# EAGLE board mainboard (EAGLE 7.5.0)

Size 93.65 x 52.06 mm. Coordinates in mm from the lower left corner, seen from the top.
Outline: 0,0 93.65,0 93.65,52.06 0,52.06 0,0
Copper layers (1*16): Top 0.035mm / dielectric 1.5mm / Bottom 0.035mm
Design rules "default": minimum track width 10mil, minimum drill 24mil, track to track 8mil, track to pad 8mil, pad to pad 8mil, via to via 8mil, smd to smd 8mil, copper to edge 40mil, drill to drill 8mil, minimum pad ring 10mil, minimum via ring 8mil, stop-mask expansion 4mil, vias tented up to drill 0mil, thermal gap 10mil

## Footprints (pad centres in the part's own frame; a part is rotated, then mirrored left to right if it is on the bottom)
153CLV-0405 = smd 2.6 x 1.6: + 1.8,0; - -1.8,0
C0603K = smd 1.05 x 1.08: 1 -0.875,0; 2 0.875,0
1X15SMD = smd 1.016 x 3.302: 1 -1.27,1.27; 2 1.27,-1.27; 3 3.81,1.27; 4 6.35,-1.27; 5 8.89,1.27; 6 11.43,-1.27; 7 13.97,1.27; 8 16.51,-1.27; 9 19.05,1.27; 10 21.59,-1.27; 11 24.13,1.27; 12 26.67,-1.27; 13 29.21,1.27; 14 31.75,-1.27; 15 34.29,1.27
1X07SMD = smd 1.016 x 3.302: 1 -1.27,1.27; 2 1.27,-1.27; 3 3.81,1.27; 4 6.35,-1.27; 5 8.89,1.27; 6 11.43,-1.27; 7 13.97,1.27
L4035M = smd 2.2 x 1.4: 1 -1.6,0; 2 1.6,0
WS2812B = smd 2 x 1.1: DIN 2,1.7; DOUT -2,-1.7; VDD -2,1.7; VSS 2,-1.7
R0603 = smd 1 x 1.1: 1 -0.85,0; 2 0.85,0
255SB = drill 1.118 long: 1 -3.81,0; 2 0,0; 3 3.81,0
XCVR_DWM1000 = smd 2.45 x 1: 1 -6.4,1.8; 2 -6.4,0.4; 3 -6.4,-1; 4 -6.4,-2.4; 5 -6.4,-3.8; 6 -6.4,-5.2; 7 -6.4,-6.6; 8 -6.4,-8; 17 6.4,-8; 18 6.4,-6.6; 19 6.4,-5.2; 20 6.4,-3.8; 21 6.4,-2.4; 22 6.4,-1; 23 6.4,0.4; 24 6.4,1.8 | smd 1 x 2.45: 9 -4.9,-10.295; 10 -3.5,-10.295; 11 -2.1,-10.295; 12 -0.7,-10.295; 13 0.7,-10.295; 14 2.1,-10.295; 15 3.5,-10.295; 16 4.9,-10.295
ESP12-SMD = smd 3 x 1.2: ADC -8.3,3.8; CH_PD -8.3,1.8; GND 8.1,-8.2; GPIO0 8.1,-2.2; GPIO2 8.1,-4.2; GPIO4 8.1,1.8; GPIO5 8.1,-0.2; GPIO12 -8.3,-4.2; GPIO13 -8.3,-6.2; GPIO14 -8.3,-2.2; GPIO15 8.1,-6.2; GPIO16 -8.3,-0.2; RESET -8.3,5.8; RXD0 8.1,3.8; TXD0 8.1,5.8; VCC -8.3,-8.2
HSOP8 = smd 0.54 x 1.27: 1 -1.905,-2.785; 2 -0.635,-2.785; 3 0.635,-2.785; 4 1.905,-2.785; 5 1.905,2.785; 6 0.635,2.785; 7 -0.635,2.785; 8 -1.905,2.785 | smd 3.2 x 2.51: 9 0,0
43045-0412 = drill 1.02 square: P$1 1.5,0 | drill 1.02: P$2 -1.5,0; P$3 1.5,3; P$4 -1.5,3 | hole 1.02: 4.5,3.94; -4.5,3.94
43045-0415 = smd 1.27 x 2.54: P$1 1.5,-4.7; P$2 -1.5,-4.7; P$3 1.5,4.7; P$4 -1.5,4.7 | hole 2.41: -3.65,0; 3.65,0

## Placement (x,y rotation side)
C1  [153CLV-0405]  21.59,31.75 180 top
C2  [153CLV-0405]  68.58,39.37 0 top
C3  [C0603K]  72.39,44.45 90 top
C4  [C0603K]  19.05,40.64 90 top
C5  [153CLV-0405]  74.93,21.59 180 top
C6  [153CLV-0405]  21.59,25.4 180 top
JP1  Nucleo R  [1X15SMD]  55.88,35.56 270 top
JP2  Nucleo L  [1X15SMD]  41.91,35.56 270 top
JP3  Motor LR  [1X07SMD]  30.48,15.24 270 top
JP4  Motor LL  [1X07SMD]  17.78,15.24 270 top
JP5  Motor RL  [1X07SMD]  81.28,15.24 270 top
JP6  Motor RR  [1X07SMD]  68.58,15.24 270 top
L1  [L4035M]  54.61,49.53 180 top
LED1  WS2812B  [WS2812B]  19.05,46.99 0 top
R1  [R0603]  64.77,48.26 90 top
R2  [R0603]  67.31,48.26 90 top
S1  [255SB]  44.45,48.26 0 top
U1  DWM1000  [XCVR_DWM1000]  7.62,39.37 0 top
U2  ESP8266  [ESP12-SMD]  83.82,36.83 0 top
U$1  ST1S10PHR  [HSOP8]  59.69,41.91 0 top
X1  [43045-0412]  31.75,27.94 0 top
X2  [43045-0412]  66.04,27.94 0 top
X3  [43045-0415]  30.48,46.99 90 top

## Library data of the parts
C1-C6 L1 R1 R2 = rcl
JP1-JP6 = pinhead-2
LED1 = WS2812B
S1 = switch
U1 = DWM1000
U2 = esp8266modules
U$1 = ST1S10PHR
X1-X3 = con-molex-micro-fit-3_0

## Nets
+5V: C2.+ L1.2 R1.2
+12V: S1.2 X3.P$3 X3.P$4
GND: C1.- C2.- C3.2 C5.- C6.- R2.1 U$1.4 U$1.5 U$1.8 U$1.9 X3.P$1 X3.P$2
LED1: LED1.DIN
N$2: L1.1 U$1.7
N$4: R1.1 R2.2 U$1.3
N$5: C1.+ C3.1 S1.1 U$1.1 U$1.2 U$1.6
N$16: C4.1 LED1.VSS
N$17: C5.+
N$18: C6.+
N$19: X2.P$4
N$20: X2.P$3
N$21: X2.P$2
N$22: X2.P$1
N$23: X1.P$4
N$24: X1.P$3
N$25: X1.P$2
N$26: X1.P$1
VDD: LED1.VDD
VDD3V3: U1.6 U1.7
VDDAON: U1.5
VSS: U1.8 U1.16 U1.21 U1.23 U1.24

## Tracks (layer width: path | path; a pad name or v marks a point on that pad's centre or on a via)
+5V  (2 unrouted)
+12V  (2 unrouted)
GND  (11 unrouted)
N$2  (1 unrouted)
N$4  (2 unrouted)
N$5  (5 unrouted)
N$16  (1 unrouted)
VDD3V3  (1 unrouted)
VSS  (4 unrouted)